# EAGLE board version_1_1 (EAGLE 7.6.0)
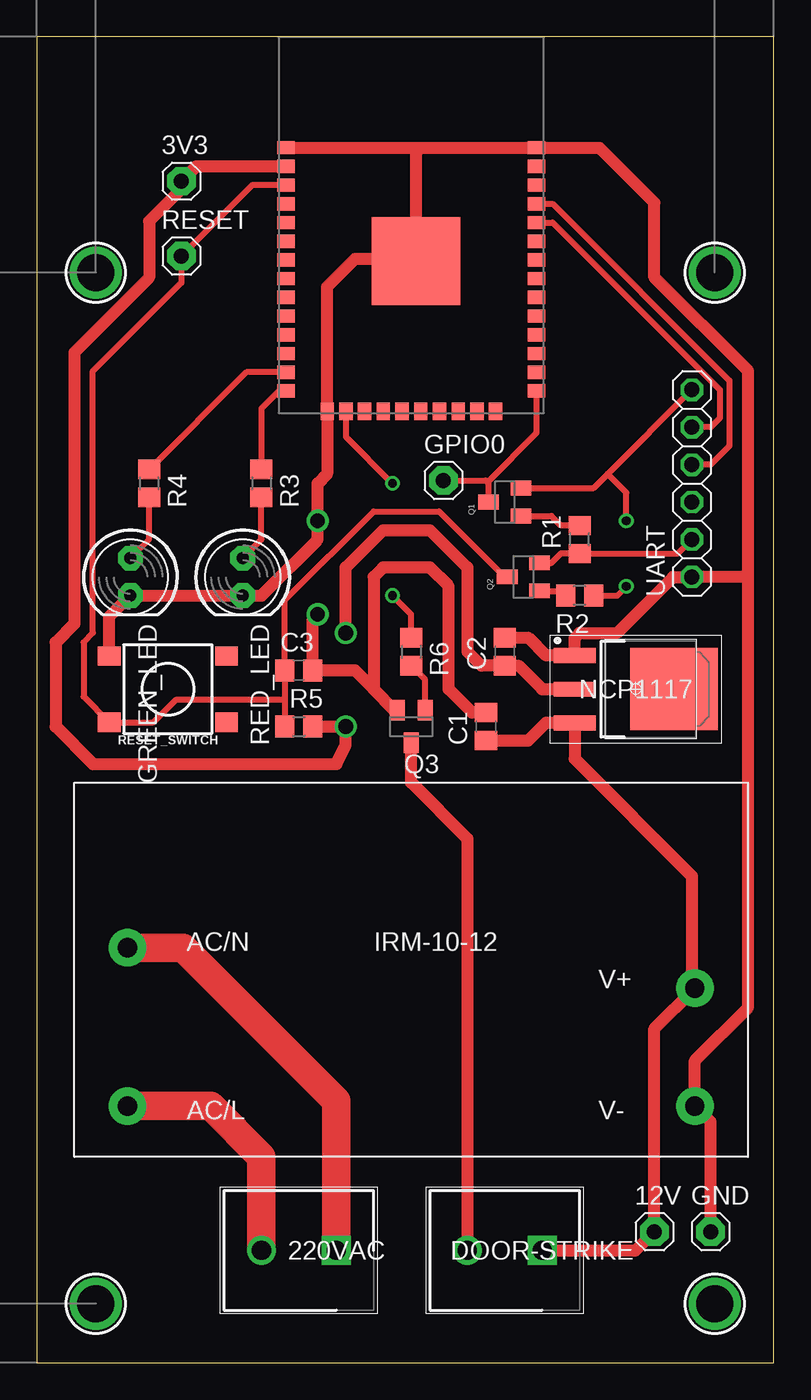
[diagram p0: board, top side]
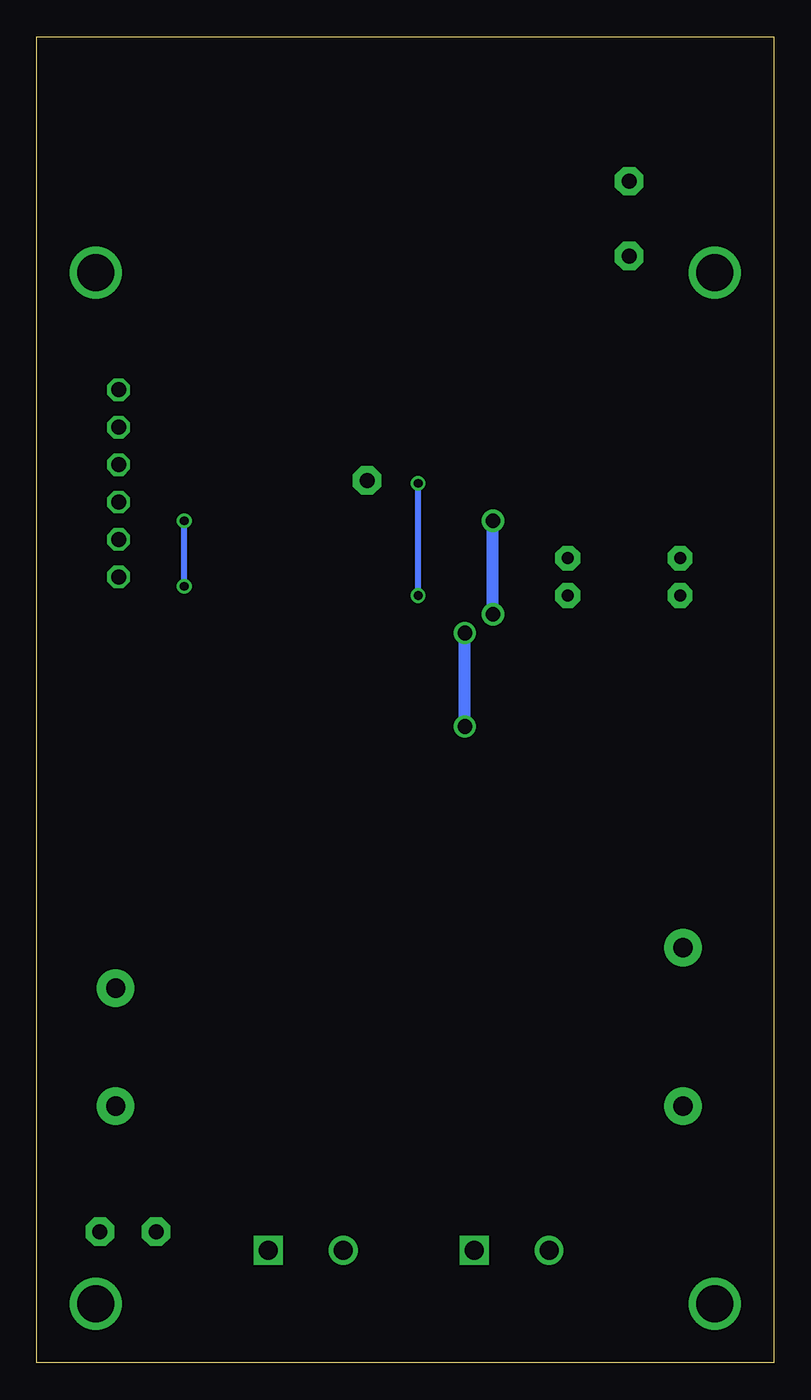
[diagram p1: board, bottom side, seen from below]

Size 50 x 90 mm. Coordinates in mm from the lower left corner, seen from the top.
Outline: 0,0 50,0 50,90 0,90 0,0
Copper layers (1*16): Top 0.035mm / dielectric 1.5mm / Bottom 0.035mm
Design rules "default": minimum track width 10mil, minimum drill 24mil, track to track 8mil, track to pad 8mil, pad to pad 8mil, via to via 8mil, smd to smd 8mil, copper to edge 40mil, drill to drill 8mil, minimum pad ring 10mil, minimum via ring 8mil, stop-mask expansion 4mil, vias tented up to drill 0mil, thermal gap 10mil

## Footprints (pad centres in the part's own frame; a part is rotated, then mirrored left to right if it is on the bottom)
1X01 = drill 1.016 pad 1.93 octagon: 1 0,0
HDRV2W110P0X508_1X2_1016X810X1 = drill 1.3 pad 1.95 square: 1 0,0 | drill 1.3 pad 1.95: 2 5.08,0
C0805 = smd 1.3 x 1.5: 1 -0.95,0; 2 0.95,0
WROOM32_SKINNY = smd 1.2 x 0.9: 1 -8.5,5; 2 -8.5,3.73; 3 -8.5,2.46; 4 -8.5,1.19; 5 -8.5,-0.08; 6 -8.5,-1.35; 7 -8.5,-2.62; 8 -8.5,-3.89; 9 -8.5,-5.16; 10 -8.5,-6.43; 11 -8.5,-7.7; 12 -8.5,-8.97; 13 -8.5,-10.24; 14 -8.5,-11.51; 25 8.5,-11.51; 26 8.5,-10.24; 27 8.5,-8.97; 28 8.5,-7.7; 29 8.5,-6.43; 30 8.5,-5.16; 31 8.5,-3.89; 32 8.5,-2.62; 33 8.5,-1.35; 34 8.5,-0.08; 35 8.5,1.19; 36 8.5,2.46; 37 8.5,3.73; 38 8.5,5 | smd 0.9 x 1.2: 15 -5.7,-12.9; 16 -4.43,-12.9; 17 -3.16,-12.9; 18 -1.89,-12.9; 19 -0.62,-12.9; 20 0.65,-12.9; 21 1.92,-12.9; 22 3.19,-12.9; 23 4.46,-12.9; 24 5.73,-12.9 | smd 6 x 6: P$1 0.34,-2.7
LED5MM = drill 0.813 pad 1.676 octagon: A -1.27,0; K 1.27,0
IRM_05/10 = drill 1.3 pad 2.54: AC/L -19.25,-9.25; AC/N -19.25,1.5; V+ 19.25,-1.25; V- 19.25,-9.25
TO229P990X238-4N = smd 2.85 x 1: 1 -4.15,2.29; 2 -4.15,0; 3 -4.15,-2.29 | smd 5.95 x 5.55: 4 2.6,0
SOT23 = smd 1 x 1.4: 1 -0.95,-1.1; 2 0.95,-1.1; 3 0,1.1
R0805 = smd 1.3 x 1.5: 1 -0.95,0; 2 0.95,0
TACTILE_SWITCH_SMD_6.2MM_TALL = smd 1.55 x 1.3: A1 -3.975,-2.25; A2 3.975,-2.25; B1 -3.975,2.25; B2 3.975,2.25
MOUNTINGHOLE_2.5_PLATED = drill 2.5 pad 3.2: P$1 0,0
1X06 = drill 1.016 octagon: 1 -6.35,0; 2 -3.81,0; 3 -1.27,0; 4 1.27,0; 5 3.81,0; 6 6.35,0

## Placement (x,y rotation side)
3V3  [1X01]  9.81,80.2 0 top
12V  [1X01]  41.91,8.89 0 top
220VAC  1729128  [HDRV2W110P0X508_1X2_1016X810X1]  20.32,7.62 180 top
C1  10uF  [C0805]  30.48,43.18 90 top
C2  10uF  [C0805]  31.75,48.26 90 top
C3  1uF  [C0805]  17.78,46.99 0 top
DOOR-STRIKE  1729128  [HDRV2W110P0X508_1X2_1016X810X1]  34.29,7.62 180 top
ESP32  ESP32_WROOM32_SKINNY  [WROOM32_SKINNY]  25.4,77.47 0 top
GND  [1X01]  45.72,8.89 0 top
GPIO0  [1X01]  27.59,59.88 0 top
GREEN_LED  [LED5MM]  6.35,53.34 270 top
IRM-10-12  [IRM_05/10]  25.4,26.67 0 top
NCP1117  NCP1117DT33G  [TO229P990X238-4N]  40.64,45.72 0 top
Q1  MMBT2222  [SOT23]  31.75,58.42 90 top
Q2  MMBT2222  [SOT23]  33.02,53.34 90 top
Q3  DMN6140L  [SOT23]  25.4,43.18 180 top
R1  10k  [R0805]  36.83,55.88 90 top
R2  10k  [R0805]  36.83,52.07 180 top
R3  1k  [R0805]  15.24,59.69 270 top
R4  1k  [R0805]  7.62,59.69 270 top
R5  10k  [R0805]  17.78,43.18 0 top
R6  1k  [R0805]  25.4,48.26 270 top
RED_LED  [LED5MM]  13.97,53.34 270 top
RESET  [1X01]  9.81,75.12 0 top
RESET_SWITCH  MOMENTARY-SWITCH  [TACTILE_SWITCH_SMD_6.2MM_TALL]  8.89,45.72 180 top
U$1  MOUNTINGHOLE2.5  [MOUNTINGHOLE_2.5_PLATED]  46,74 0 top
U$2  MOUNTINGHOLE2.5  [MOUNTINGHOLE_2.5_PLATED]  46,4 0 top
U$3  MOUNTINGHOLE2.5  [MOUNTINGHOLE_2.5_PLATED]  4,74 0 top
U$4  MOUNTINGHOLE2.5  [MOUNTINGHOLE_2.5_PLATED]  4,4 0 top
UART  [1X06]  44.45,59.69 90 top

## Library data of the parts
3V3 12V GND GPIO0 GREEN_LED Q3 RED_LED RESET UART = adafruit
220VAC DOOR-STRIKE = 1729128; ALLIED_NUMBER: 70054405; DESCRIPTION: 2way low profile vertical mount terminal Phoenix Contact Non-Fused Terminal Block, 2 Way, Solder Terminals, 30 ??? 14 AWG Through Hole, Nylon, 630 V; HEIGHT: 10mm; MANUFACTURER_NAME: Phoenix Contact; MANUFACTURER_PART_NUMBER: 1729128; RS_PART_NUMBER: 1930586; SUPPLIER_NAME: RS
C1-C3 R1-R6 = rcl
ESP32 Q1 Q2 = Adafruit HUZZAH32 ESP32 Feather
IRM-10-12 = meanwell_irm_v5
NCP1117 = NCP1117DT33G; ALLIED_NUMBER: 70340549; DESCRIPTION: 1A,3.3V,LDO Voltage Reg.,NCP1117DT33 NCP1117DT33G, Low Dropout Voltage Regulator, 1A, 3.3 V 1%, 3-Pin DPAK; HEIGHT: 2.38mm; MANUFACTURER_NAME: ON Semiconductor; MANUFACTURER_PART_NUMBER: NCP1117DT33G; RS_PART_NUMBER: 1023504; SUPPLIER_NAME: RS
RESET_SWITCH = SparkFun-Switches; PROD_ID: SWCH-11966; SF_SKU: COM-12992
U$1-U$4 = Adafruit HUZZAH32 ESP32 Feather; BOM: EXCLUDE

## Nets
+3V3: 3V3.1 C2.1 ESP32.2 NCP1117.2 R5.2
+12V: 12V.1 C1.1 DOOR-STRIKE.1 IRM-10-12.V+ NCP1117.3
AC_L: 220VAC.2 IRM-10-12.AC/L
AC_N: 220VAC.1 IRM-10-12.AC/N
DTR: Q1.2 R2.1 UART.6
GND: C1.2 C2.2 C3.2 ESP32.1 ESP32.15 ESP32.38 ESP32.P$1 GND.1 GREEN_LED.K IRM-10-12.V- NCP1117.1 Q3.2 RED_LED.K RESET_SWITCH.A2 UART.1
GPIO0: ESP32.25 GPIO0.1 Q1.3
GPIO12: ESP32.14 R3.1
GPIO13: ESP32.16 R6.1
GPIO14: ESP32.13 R4.1
GPIO15: ESP32.23
GPIO27: ESP32.12
LOCK_N: DOOR-STRIKE.2 Q3.3
N$1: R3.2 RED_LED.A
N$2: Q1.1 R1.2
N$3: Q2.1 R2.2
N$4: GREEN_LED.A R4.2
N$5: UART.3
N$6: Q3.1 R6.2
RESET: C3.1 ESP32.3 Q2.3 R5.1 RESET.1 RESET_SWITCH.B2
RTS: Q2.2 R1.1 UART.2
RXD0: ESP32.34 UART.5
TXD0: ESP32.35 UART.4

## Tracks (layer width: path | path; a pad name or v marks a point on that pad's centre or on a via)
+3V3  (via drill 1)
  Top 0.813: ESP32.2 10.81,81.2 3V3.1 9.81,79.66 7.62,77.47 7.62,73.66 2.54,68.58 2.54,50.16 1.27,48.9 1.27,43.18 3.81,40.64 20.32,40.64 20.95,41.91 v20.95,43.18 R5.2 | v20.95,49.53 20.95,53.98 23.5,56.52 26.67,56.52 29.21,53.98 29.21,48.26 30.16,47.31 C2.1 32.7,47.31 34.29,45.72 NCP1117.2
  Bottom 0.813: v20.95,43.18 v20.95,49.53
+12V
  Top 0.813: DOOR-STRIKE.1 40.64,7.62 12V.1 41.91,22.68 IRM-10-12.V+ 44.45,25.62 44.45,33.02 36.49,40.98 NCP1117.3 34.54,43.43 33.34,42.23 C1.1
AC_L
  Top 1.93: 220VAC.2 15.24,13.97 11.79,17.42 IRM-10-12.AC/L
AC_N
  Top 1.93: IRM-10-12.AC/N 9.93,28.17 20.32,17.78 220VAC.1
DTR  (via drill 0.6)
  Top 0.406: 33.17,59.69 Q1.2 37.78,59.37 38.73,60.33 | 38.73,60.33 UART.6 | R2.1 39.37,52.07 v40.01,52.7 | v40.01,57.15 40.01,59.05 38.73,60.33
  Bottom 0.406: v40.01,52.7 v40.01,57.15
GND  (via drill 1)
  Top 0.813: GND.1 45.72,16.35 IRM-10-12.V- 44.65,20.52 48.26,24.13 48.26,53.34 | 48.26,53.34 48.26,67.31 41.91,73.66 41.91,78.74 38.18,82.47 ESP32.38 26.04,82.47 | 48.26,53.34 UART.1 43.18,53.34 39.37,49.53 36.83,49.53 36.49,49.19 NCP1117.1 34.54,48.01 33.34,49.21 C2.2 | RESET_SWITCH.A2 4.92,50.63 GREEN_LED.K RED_LED.K 15.24,52.07 19.05,55.88 v19.05,57.15 19.05,59.69 19.7,60.34 ESP32.15 19.7,73.04 21.59,74.93 25.58,74.93 ESP32.P$1 25.74,82.17 26.04,82.47 | ESP32.1 26.04,82.47 | v19.05,50.8 18.73,50.48 C3.2 21.59,46.99 22.86,45.72 | Q3.2 24.3,44.28 22.86,45.72 | C1.2 29.53,44.13 27.94,45.72 27.94,52.7 26.67,53.98 23.5,53.98 22.86,53.34 22.86,45.72
  Bottom 0.813: v19.05,50.8 v19.05,57.15
GPIO0
  Top 0.406: Q1.3 30.65,59.69 | 30.65,59.69 30.65,59.86 33.9,63.11 ESP32.25 | GPIO0.1 30.46,59.88 30.65,59.69
GPIO12
  Top 0.406: ESP32.14 16.43,65.96 15.24,64.77 R3.1
GPIO13  (via drill 0.6)
  Top 0.406: ESP32.16 20.97,62.85 v24.13,59.69 | R6.1 25.4,50.8 v24.13,52.07
  Bottom 0.406: v24.13,52.07 v24.13,59.69
GPIO14
  Top 0.406: ESP32.13 14.21,67.23 R4.1
LOCK_N
  Top 0.813: DOOR-STRIKE.2 29.21,35.56 25.4,39.37 Q3.3
N$1
  Top 0.406: RED_LED.A 15.24,55.88 R3.2
N$2
  Top 0.406: Q1.1 34.92,57.47 35.56,56.83 R1.2
N$3
  Top 0.406: Q2.1 35.56,52.39 R2.2
N$4
  Top 0.406: GREEN_LED.A 7.62,55.88 R4.2
N$6
  Top 0.406: Q3.1 26.35,46.36 R6.2
RESET
  Top 0.406: 16.83,45 C3.1 16.83,51.76 22.86,57.78 27.3,57.78 31.75,53.34 Q2.3 | 16.83,45 R5.1 | 16.83,45 9.44,45 7.91,43.47 RESET_SWITCH.B2 3.17,45.21 3.17,48.9 3.81,49.53 3.81,67.31 9.81,73.31 RESET.1 14.62,79.93 ESP32.3
RTS
  Top 0.406: Q2.2 34.92,54.29 35.56,54.93 R1.1 43.5,54.93 UART.2
RXD0
  Top 0.406: ESP32.34 35.01,77.39 46.35,66.04 46.35,64.14 45.72,63.5 UART.5
TXD0
  Top 0.406: ESP32.35 35.01,78.66 46.99,66.67 46.99,62.23 45.72,60.96 UART.4